# Altium PCB YYB.PcbDoc (part 2 of 2)
Units mil, origin at the board's own origin, x right, y up, seen from the top; angles counter-clockwise.
Board outline 1345.03 x 10347.55 mil, 2 copper layers (Top Layer, Bottom Layer); 145 components, 177 nets, 539 pads, 284 vias.
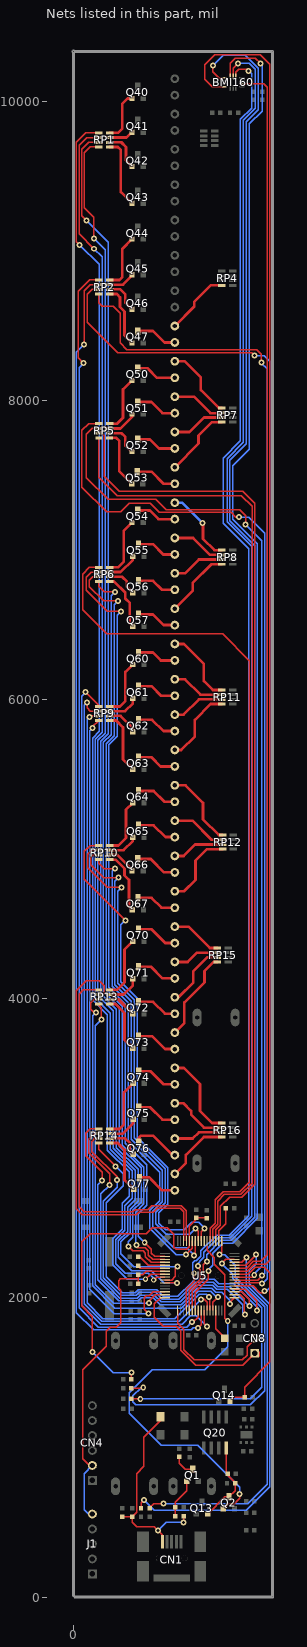
[diagram p2: the nets of this part, all layers, seen from the top]

## Via types
v1: diameter 40, hole 20, Top Layer to Bottom Layer, 282 vias
v2: diameter 35, hole 20, Top Layer to Bottom Layer, 2 vias

## Nets (pads, with @x,y where several pads share a name; then routed paths per layer and width w, separated by ;. In a path a pad name is that pad's centre, name@x,y a point inside that pad or via, vN(x,y) a via of type N, cw(c..) or ccw(c..) an arc to the next point about the centre after c; other vN are vias at no path point) (continued)
NetLD47_1: LD47.1 RP4.4 | length 445.5
  Top Layer w18: LD47.1@676.38,8498.5 805,8627.13 805,8660 915.51,8770.51 RP4.4@990,8770.51
NetLD47_2: LD47.2 Q47.3 | length 280.1
  Top Layer w18: Q47.3@428,8465 530,8465 606.5,8388.5 LD47.2@676.38,8388.5
NetLD50_1: LD50.1 RP7.1 | length 492.8
  Top Layer w18: LD50.1@676.38,8262.28 742.72,8262.28 850,8155 850,8070 970,7950 RP7.1@990,7950
NetLD50_2: LD50.2 Q50.3 | length 274.4
  Top Layer w18: Q50.3@428,8215 495,8215 557.72,8152.28 LD50.2@676.38,8152.28
NetLD51_1: LD51.1 RP7.2 | length 370.2
  Top Layer w18: LD51.1@676.38,8026.06 803.94,8026.06 913.99,7916.01 995,7916.01 992.5,7918.5 RP7.2@990,7918.5
NetLD51_2: LD51.2 Q51.3 | length 279
  Top Layer w18: Q51.3@428,7990 520,7990 593.94,7916.06 LD51.2@676.38,7916.06
NetLD52_1: LD52.1 RP7.3 | length 353.9
  Top Layer w18: LD52.1@676.38,7789.84 774.84,7789.84 872.01,7887.01 RP7.3@990,7887.01
NetLD52_2: LD52.2 Q52.3 | length 273.3
  Top Layer w18: Q52.3@428,7740 510,7740 570.16,7679.84 LD52.2@676.38,7679.84
NetLD53_1: LD53.1 RP7.4 | length 469.6
  Top Layer w18: LD53.1@676.38,7553.62 835,7712.24 835,7765 925.51,7855.51 RP7.4@990,7855.51
NetLD53_2: LD53.2 Q53.3 | length 285.1
  Top Layer w18: Q53.3@425,7525 520,7525 601.38,7443.62 LD53.2@676.38,7443.62
NetLD54_1: LD54.1 RP8.1 | length 503.7
  Top Layer w18: v1(860,7180) 865,7175 865,7075 940,7000 RP8.1@990,7000
  Bottom Layer w18: LD54.1@676.38,7317.4 722.6,7317.4 v1(860,7180)
NetLD54_2: LD54.2 Q54.3 | length 272.2
  Top Layer w18: Q54.3@428,7265 510,7265 567.6,7207.4 LD54.2@676.38,7207.4
NetLD55_1: LD55.1 RP8.2 | length 360.3
  Top Layer w18: LD55.1@676.38,7081.18 798.82,7081.18 911.5,6968.5 RP8.2@990,6968.5
NetLD55_2: LD55.2 Q55.3 | length 271.9
  Top Layer w18: Q55.3@433,7040 530,7040 598.82,6971.18 LD55.2@676.38,6971.18
NetLD56_1: LD56.1 RP8.3 | length 351.7
  Top Layer w18: LD56.1@676.38,6844.96 744.96,6844.96 837.01,6937.01 RP8.3@990,6937.01
NetLD56_2: LD56.2 Q56.3 | length 268.2
  Top Layer w18: Q56.3@433,6795 530,6795 590.04,6734.96 LD56.2@676.38,6734.96
NetLD57_1: LD57.1 RP8.4 | length 467.4
  Top Layer w18: LD57.1@676.38,6608.74 795,6727.36 795,6780 920.51,6905.51 RP8.4@990,6905.51
NetLD57_2: LD57.2 Q57.3 | length 272.9
  Top Layer w18: Q57.3@433,6570 530,6570 601.26,6498.74 LD57.2@676.38,6498.74
NetLD60_1: LD60.1 RP11.1 | length 508.4
  Top Layer w18: LD60.1@676.38,6372.52 737.48,6372.52 870,6240 870,6125 930,6065 RP11.1@990,6065
NetLD60_2: LD60.2 Q60.3 | length 265.1
  Top Layer w18: Q60.3@433,6315 530,6315 582.48,6262.52 LD60.2@676.38,6262.52
NetLD61_1: LD61.1 RP11.2 | length 356.2
  Top Layer w18: LD61.1@676.38,6136.3 743.7,6136.3 846.5,6033.5 RP11.2@990,6033.5
NetLD61_2: LD61.2 Q61.3 | length 269.8
  Top Layer w18: Q61.3@433,6090 520,6090 583.7,6026.3 LD61.2@676.38,6026.3
NetLD62_1: LD62.1 RP11.3 | length 355.8
  Top Layer w18: LD62.1@676.38,5900.08 735.08,5900.08 837.01,6002.01 RP11.3@990,6002.01
NetLD62_2: LD62.2 Q62.3 | length 274.4
  Top Layer w18: Q62.3@433,5865 525,5865 599.92,5790.08 LD62.2@676.38,5790.08
NetLD63_1: LD63.1 RP11.4 | length 505.1
  Top Layer w18: LD63.1@676.38,5663.86 718.86,5663.86 810,5755 810,5865 915.51,5970.51 RP11.4@990,5970.51
NetLD63_2: LD63.2 Q63.3 | length 268.7
  Top Layer w18: Q63.3@433,5615 520,5615 581.14,5553.86 LD63.2@676.38,5553.86
NetLD64_1: LD64.1 RP12.1 | length 520.8
  Top Layer w18: LD64.1@676.38,5427.64 747.36,5427.64 865,5310 865,5200 970,5095 RP12.1@995,5095
NetLD64_2: LD64.2 Q64.3 | length 273.4
  Top Layer w18: Q64.3@433,5390 535,5390 607.36,5317.64 LD64.2@676.38,5317.64
NetLD65_1: LD65.1 RP12.2 | length 371.6
  Top Layer w18: LD65.1@676.38,5191.42 793.58,5191.42 921.5,5063.5 RP12.2@995,5063.5
NetLD65_2: LD65.2 Q65.3 | length 275.9
  Top Layer w18: Q65.3@433,5160 535,5160 613.58,5081.42 LD65.2@676.38,5081.42
NetLD66_1: LD66.1 RP12.3 | length 350.4
  Top Layer w18: LD66.1@676.38,4955.2 735.2,4955.2 812.01,5032.01 RP12.3@995,5032.01
NetLD66_2: LD66.2 Q66.3 | length 285.6
  Top Layer w18: Q66.3@428,4935 515,4935 604.8,4845.2 LD66.2@676.38,4845.2
NetLD67_1: LD67.1 RP12.4 | length 511.4
  Top Layer w18: LD67.1@676.38,4718.98 738.98,4718.98 815,4795 815,4925 890.51,5000.51 RP12.4@995,5000.51
NetLD67_2: LD67.2 Q67.3 | length 273.7
  Top Layer w18: Q67.3@430,4675 520,4675 586.02,4608.98 LD67.2@676.38,4608.98
NetLD70_1: LD70.1 RP15.1 | length 342.8
  Top Layer w18: LD70.1@676.38,4482.76 767.24,4482.76 910,4340 RP15.1@960,4340
NetLD70_2: LD70.2 Q70.3 | length 281.6
  Top Layer w18: Q70.3@433,4465 520,4465 612.24,4372.76 LD70.2@676.38,4372.76
NetLD71_1: LD71.1 RP15.2 | length 309.3
  Top Layer w18: LD71.1@676.38,4246.54 761.54,4246.54 823.5,4308.5 RP15.2@960,4308.5
NetLD71_2: LD71.2 Q71.3 | length 275.9
  Top Layer w18: Q71.3@433,4215 515,4215 593.46,4136.54 LD71.2@676.38,4136.54
NetLD72_1: LD72.1 RP15.3 | length 438
  Top Layer w18: LD72.1@676.38,4010.32 700.32,4010.32 800,4110 800,4185 892.01,4277.01 RP15.3@960,4277.01
NetLD72_2: LD72.2 Q72.3 | length 276.4
  Top Layer w18: Q72.3@433,3980 530,3980 609.68,3900.32 LD72.2@676.38,3900.32
NetLD73_1: LD73.1 RP15.4 | length 603.2
  Top Layer w18: LD73.1@676.38,3774.09 740,3837.72 740,3975 875,4110 875,4185 935.51,4245.51 RP15.4@960,4245.51
NetLD73_2: LD73.2 Q73.3 | length 279
  Top Layer w18: Q73.3@433,3750 525,3750 610.91,3664.09 LD73.2@676.38,3664.09
NetLD74_1: LD74.1 RP16.1 | length 571.4
  Top Layer w18: LD74.1@676.38,3537.87 737.13,3537.87 845,3430 845,3250 925,3170 RP16.1@990,3170
NetLD74_2: LD74.2 Q74.3 | length 277.5
  Top Layer w18: Q74.3@435,3515 515,3515 602.13,3427.87 LD74.2@676.38,3427.87
NetLD75_1: LD75.1 RP16.2 | length 395.8
  Top Layer w18: LD75.1@676.38,3301.65 733.35,3301.65 785,3250 785,3225 871.5,3138.5 RP16.2@990,3138.5
NetLD75_2: LD75.2 Q75.3 | length 275.9
  Top Layer w18: Q75.3@435,3275 510,3275 593.35,3191.65 LD75.2@676.38,3191.65
NetLD76_1: LD76.1 RP16.3 | length 330.8
  Top Layer w18: LD76.1@676.38,3065.43 795.43,3065.43 837.01,3107.01 RP16.3@990,3107.01
NetLD76_2: LD76.2 Q76.3 | length 331.3
  Top Layer w18: Q76.3@435,3040 435,3070 450,3085 530,3085 659.57,2955.43 LD76.2@676.38,2955.43
NetLD77_1: LD77.1 RP16.4 | length 446.2
  Top Layer w18: LD77.1@676.38,2829.21 750,2902.83 750,2955 870.51,3075.51 RP16.4@990,3075.51
NetLD77_2: LD77.2 Q77.3 | length 271.9
  Top Layer w18: Q77.3@440,2805 505,2805 590.79,2719.21 LD77.2@676.38,2719.21
NetQ1_1: Q1.1 R30.1 R31.2 | length 266.9
  Top Layer w10: R30.1@680,540 R31.2@680,600 680,635 757,712 Q1.1@757,775
NetQ1_3: Q1.3 R33.1 | length 149.1
  Top Layer w10: R33.1@705,937.5 705,895 745,855 Q1.3@795,855
NetQ2_3: Q2.3 Q13.2 Q20.4 R34.1 R35.1 | length 560.5
  Top Layer w10: Q13.2@895,555 1010,670 Q2.3@1038,670 1080,712 R34.1@1080,760 1080,765 1030,815 R35.1@1030,825 1020,835 Q20.4@1020,997.64
NetQ40_1: Q40.1 RP1.8 | length 341.9
  Top Layer w18: RP1.8@240,9790 295,9790 325,9820 325,9985 360,10020 Q40.1@390,10020
NetQ41_1: Q41.1 RP1.7 | length 165.1
  Top Layer w18: RP1.7@240,9758.5 353.5,9758.5 Q41.1@390,9795
NetQ42_1: Q42.1 RP1.6 | length 269.8
  Top Layer w18: RP1.6@240,9727.01 317.99,9727.01 350,9695 350,9605 Q42.1@390,9565
NetQ43_1: Q43.1 RP1.5 | length 469.6
  Top Layer w18: RP1.5@240,9695.51 294.49,9695.51 315,9675 315,9395 Q43.1@390,9320
NetQ44_1: Q44.1 RP2.8 | length 374.6
  Top Layer w18: RP2.8@240,8806.5 306.5,8806.5 325,8825 325,9015 Q44.1@390,9080
NetQ45_1: Q45.1 RP2.7 | length 179.9
  Top Layer w18: RP2.7@240,8775 330,8775 390,8835 Q45.1@390,8840
NetQ46_1: Q46.1 RP2.6 | length 237.5
  Top Layer w18: RP2.6@240,8743.5 311.5,8743.5 345,8710 345,8655 Q46.1@390,8610
NetQ47_1: Q47.1 RP2.5 | length 417.3
  Top Layer w18: RP2.5@240,8712.01 287.99,8712.01 310,8690 310,8625 340,8595 340,8435 Q47.1@390,8385
NetQ50_1: Q50.1 RP5.8 | length 381.4
  Top Layer w18: RP5.8@240,7845 290,7845 330,7885 330,8075 Q50.1@390,8135
NetQ51_1: Q51.1 RP5.7 | length 201.7
  Top Layer w18: RP5.7@240,7813.5 313.5,7813.5 390,7890 Q51.1@390,7910
NetQ52_1: Q52.1 RP5.6 | length 232.8
  Top Layer w18: RP5.6@240,7782.01 317.99,7782.01 345,7755 345,7700 385,7660 Q52.1@390,7660
NetQ53_1: Q53.1 RP5.5 | length 392.5
  Top Layer w18: RP5.5@240,7750.51 284.49,7750.51 305,7730 305,7527 Q53.1@387,7445
NetQ54_1: Q54.1 RP6.8 | length 394.4
  Top Layer w18: RP6.8@240,6885 295,6885 335,6925 335,7130 Q54.1@390,7185
NetQ55_1: Q55.1 RP6.7 | length 213.8
  Top Layer w18: RP6.7@240,6853.5 313.5,6853.5 395,6935 Q55.1@395,6960
NetQ56_1: Q56.1 RP6.6 | length 219.8
  Top Layer w18: RP6.6@240,6822.01 322.99,6822.01 355,6790 355,6755 Q56.1@395,6715
NetQ57_1: Q57.1 RP6.5 | length 382
  Top Layer w18: RP6.5@240,6790.51 269.49,6790.51 345,6715 345,6675 375,6645 375,6510 Q57.1@395,6490
NetQ60_1: Q60.1 RP9.8 | length 385.2
  Top Layer w18: RP9.8@240,5955 310,5955 345,5990 345,6185 Q60.1@395,6235
NetQ61_1: Q61.1 RP9.7 | length 211.3
  Top Layer w18: RP9.7@240,5923.5 343.5,5923.5 395,5975 Q61.1@395,6010
NetQ62_1: Q62.1 RP9.6 | length 214
  Top Layer w18: RP9.6@240,5892.01 312.99,5892.01 395,5810 Q62.1@395,5785
NetQ63_1: Q63.1 RP9.5 | length 415.8
  Top Layer w18: RP9.5@240,5860.51 284.49,5860.51 330,5815 330,5600 Q63.1@395,5535
NetQ64_1: Q64.1 RP10.8 | length 384.4
  Top Layer w18: RP10.8@240,5025 300,5025 350,5075 350,5265 Q64.1@395,5310
NetQ65_1: Q65.1 RP10.7 | length 205.5
  Top Layer w18: RP10.7@240,4993.5 333.5,4993.5 395,5055 Q65.1@395,5080
NetQ66_1: Q66.1 RP10.6 | length 200.2
  Top Layer w18: RP10.6@240,4962.01 292.99,4962.01 390,4865 Q66.1@390,4855
NetQ67_1: Q67.1 RP10.5 | length 421.6
  Top Layer w18: RP10.5@240,4930.51 279.49,4930.51 340,4870 340,4825 370,4795 370,4617 Q67.1@392,4595
NetQ70_1: Q70.1 RP13.8 | length 418.5
  Top Layer w18: RP13.8@240,4060 290,4060 340,4110 340,4330 Q70.1@395,4385
NetQ71_1: Q71.1 RP13.7 | length 225.5
  Top Layer w18: RP13.7@240,4028.5 333.5,4028.5 395,4090 Q71.1@395,4135
NetQ72_1: Q72.1 RP13.6 | length 195.2
  Top Layer w18: RP13.6@240,3997.01 297.99,3997.01 Q72.1@395,3900
NetQ73_1: Q73.1 RP13.5 | length 382.8
  Top Layer w18: RP13.5@240,3965.51 279.49,3965.51 340,3905 340,3725 Q73.1@395,3670
NetQ74_1: Q74.1 RP14.8 | length 408.1
  Top Layer w18: RP14.8@240,3130 305,3130 335,3160 335,3373 Q74.1@397,3435
NetQ75_1: Q75.1 RP14.7 | length 213.4
  Top Layer w18: RP14.7@240,3098.5 328.5,3098.5 397,3167 Q75.1@397,3195
NetQ76_1: Q76.1 RP14.6 | length 232.4
  Top Layer w18: RP14.6@240,3067.01 342.99,3067.01 375,3035 375,2982 Q76.1@397,2960
NetQ77_1: Q77.1 RP14.5 | length 409.5
  Top Layer w18: RP14.5@240,3035.51 294.49,3035.51 340,2990 340,2787 Q77.1@402,2725
NetR7_2: R7.2 R13.1 R15.2 U5.60 | length 2285
  Top Layer w10: v1(125,1640) 125,1875 54,1946 54,2374 110,2430 485,2430 525,2470 625,2470 670,2425 670,2340 685,2325 755,2325 773.58,2343.58 U5.60@773.58,2381.69 773.58,2478.58 820,2525 R13.1@820,2535 887.5,2535 R15.2@890,2532.5 ; R7.2@385,1455 v1(385,1500)
  Bottom Layer w10: v1(125,1640) 265,1500 v1(385,1500)
NetR11_1: R11.1 U5.5 | length 203.6
  Top Layer w10: R11.1@430,2275 440,2275 496.89,2218.11 U5.5@610,2218.11
NetR12_1: R12.1 U5.6 | length 186.9
  Top Layer w10: R12.1@430,2215 446.57,2198.43 U5.6@610,2198.43
NRST: C13.1 CN4.2 J1.5 R14.2 U5.7 | length 2180.2
  Top Layer w10: CN4.2@125,880 105,880 60,925 60,1520 217.5,1677.5 217.5,1777.5 245,1805 285,1805 315,1835 315,2050 300,2065 300,2115 312,2127 427,2127 430,2130 ; R14.2@430,2095 430,2130 ; U5.7@610,2178.74 483.74,2178.74 460,2155 C13.1@430,2155 430,2130
  Bottom Layer w10: J1.5@125,555 100,555 70,585 70,825 CN4.2@125,880
P_LANCH: Q2.1 U5.54 | length 2824.7
  Top Layer w10: 891.69,2345 891.69,2318.31 940,2270 940,2225 1010,2155 1010,1865 v1(1030,1845) ; Q2.1@1000,590 1035,625 1075,625 1110,660 v1(1110,690)
  Bottom Layer w10: v1(1030,1845) 1030,1675 875,1520 525,1520 370,1365 370,1230 585,1015 830,1015 1110,735 v1(1110,690) v1@1110,675
PA0: RP9.4 U5.14 | length 4560
  Top Layer w10: v1(125,5810) 125,5818 RP9.4@167.51,5860.51 ; v1(500,1895) 472,1923 472,2002 485,2015 505,2015 530.95,2040.95 U5.14@610,2040.95
  Bottom Layer w10: v1(125,5810) 108,5793 108,2057 270,1895 v1(500,1895)
PA1: RP13.4 U5.15 | length 2452.8
  Top Layer w10: RP13.4@167.51,3965.51 167.51,3957.49 185,3940 v1(185,3860) ; v1(505,1965) 505,1980 546.26,2021.26 U5.15@610,2021.26
  Bottom Layer w10: v1(185,3860) 144,3819 144,2087.46 268.46,1963 503,1963 v1(505,1965)
PA2: CN8.1 U5.16 | length 1124.9
  Top Layer w10: U5.16@610,2001.58 581.57,2001.58 540,1960 540,1870 600,1810 685,1810 715,1780 715,1649.54 814.54,1550 1130,1550 CN8.1@1210,1630 ; CN8.1@1232.5,1607.5 1240,1615 1240,1640
PA3: CN8.2 U5.17 | length 889.1
  Top Layer w10: U5.17@694.57,1917.01 694.57,1830.43 735,1790 735,1655 805,1585 1128.39,1585 1160,1616.61 1160,1675 CN8.2@1220,1735
PA4: BMI160.12 U5.20 | length 8805.5
  Top Layer w10: U5.20@753.62,1917.01 753.62,2058.62 805,2110 v1(805,2165) ; BMI160.12@1085,10168.74 1085,10195 1105,10215 1160,10215 v1(1170,10205)
  Bottom Layer w10: v1(805,2165) 805,2170 795,2180 795,2235 810,2250 820,2250 850,2280 850,2315 955,2420 1040,2420 1170,2550 1170,7010 1000,7180 1000,7615 1115,7730 1115,9880 1190,9955 1190,10185 v1(1170,10205)
PA5: BMI160.13 U5.21 | length 8910.6
  Top Layer w10: U5.21@773.31,1917.01 773.31,2052.85 845,2124.54 845,2190 830,2205 v1(830,2215) ; BMI160.13@1065.32,10168.74 1065.32,10220.32 v1(1100,10255)
  Bottom Layer w10: v1(830,2215) 830,2231.67 830.33,2232 832.46,2232 843,2242.54 843,2244.67 870,2271.67 870,2305 967,2402 1047.46,2402 1190,2544.54 1190,7025 1025,7190 1025,7610 1135,7720 1135,9874.54 1215,9954.54 1215,10215 1175,10255 v1(1100,10255)
PA6: BMI160.1 U5.22 | length 9169.1
  Top Layer w10: U5.22@792.99,1917.01 792.99,2047.08 867,2121.09 867,2222 v1(890,2245) ; v1(930,10240) 930,10200 971.1,10158.9 BMI160.1@1006.26,10158.9
  Bottom Layer w10: v1(890,2245) 890,2290 984,2384 1054.91,2384 1210,2539.09 1210,7030.46 1045,7195.46 1045,7600 1155,7710 1155,9865 1235,9945 1235,10220.46 1145.46,10310 1000,10310 v1(930,10240)
PA7: BMI160.14 U5.23 | length 9021.3
  Top Layer w10: U5.23@812.68,1917.01 812.68,2037.68 900,2125 v1(900,2180) ; BMI160.14@1045.63,10168.74 1045.63,10255.63 1080,10290 1215,10290 v1(1250,10255)
  Bottom Layer w10: v1(900,2180) 900,2190 930,2220 930,2300 996,2366 1062.37,2366 1228,2531.63 1228,7042 1065,7205 1065,7565 1175,7675 1175,9850 1260,9935 1260,10245 v1(1250,10255)
PA8: Q14.2 R37.2 U5.41 | length 1282.7
  Top Layer w10: Q14.2@1045,1310 1070,1335 R37.2@1142.5,1335 1142.5,1402.5 1312,1572 1312,2168 1275,2205 1213.04,2205 1167.09,2159.06 U5.41@1074.68,2159.06
PA9: BMI160.4 U5.42 | length 9002.8
  Top Layer w10: BMI160.4@1006.26,10099.84 925.16,10099.84 875,10150 875,10245 943,10313 1247,10313 1312,10248 1312,2252 1285,2225 1207.58,2225 1161.32,2178.74 U5.42@1074.68,2178.74
PA10: BMI160.9 U5.43 | length 8243.2
  Top Layer w10: U5.43@1074.68,2198.43 1155.55,2198.43 1202.12,2245 1250,2245 1294,2289 1294,10096 1270.47,10119.53 BMI160.9@1124.37,10119.53
PA11: R18.2 U5.44 | length 2806.9
  Top Layer w10: R18.2@450,592.5 450,630 v1(470,650) ; U5.44@1074.68,2218.11 1149.78,2218.11 1220,2288.33 v1(1220,2290)
  Bottom Layer w10: v1(470,650) 540,580 1155,580 1312,737 1312,1956.49 1174.18,2094.31 1174.18,2184.18 1220,2230 v1(1220,2290)
PA12: R17.2 U5.45 | length 2522.5
  Top Layer w10: R17.2@510,592.5 510,600 535,625 v1(600,625) ; U5.45@1074.68,2237.8 1122.8,2237.8 v1(1155,2270)
  Bottom Layer w10: v1(600,625) 1165,625 1294,754 1294,1949.04 1155,2088.04 v1(1155,2270)
PA13: R8.2 U5.46 | length 1939.4
  Top Layer w10: R8.2@385,1325 v1(445,1325) ; v1(990,2230) 1017.48,2257.48 U5.46@1074.68,2257.48
  Bottom Layer w10: v1(445,1325) 1180,1325 1258,1403 1258,1934.12 1062,2130.12 1062,2158 v1(990,2230)
PA14: R9.2 U5.49 | length 2299.5
  Top Layer w10: R9.2@385,1395 460,1395 v1(465,1400) ; v1(975,2290) 990.12,2305.12 U5.49@990.12,2381.69 U5.49@990.12,2385.12
  Bottom Layer w10: v1(465,1400) 450,1400 395,1345 395,1305 415,1285 1180,1285 1276,1381 1276,1941.58 1080,2137.58 1080,2220 1010,2290 v1(975,2290)
PA15: LD3.2 U5.50 | length 237.8
  Top Layer w10: U5.50@970.43,2381.69 970.43,2449.07 1017.5,2496.13 LD3.2@1017.5,2600
PB0: RP9.1 U5.26 | length 5294.8
  Top Layer w10: v1(80,6050) 167.51,5962.49 RP9.1@167.51,5955 ; U5.26@871.73,1917.01 871.73,1828.27 v1(890,1810)
  Bottom Layer w10: v1(80,6050) 54,6024 54,1952.35 181.35,1825 725,1825 780,1880 820,1880 v1(890,1810)
PB1: RP9.2 U5.27 | length 5139.6
  Top Layer w10: v1(90,5980) 90,5945 111.5,5923.5 RP9.2@167.51,5923.5 ; v1(850,1990) 872.84,1990 891.42,1971.42 U5.27@891.42,1917.01
  Bottom Layer w10: v1(90,5980) 72,5962 72,1959.81 187.81,1844 704.91,1844 850,1989.09 v1(850,1990)
PB2: RP9.3 U5.28 | length 5017.2
  Top Layer w10: v1(105,5885) 112.01,5892.01 RP9.3@167.51,5892.01 ; v1(905,2005) 911.1,1998.9 U5.28@911.1,1917.01
  Bottom Layer w10: v1(105,5885) 100,5885 90,5875 90,1967.27 195.27,1862 675.33,1862 838.33,2025 885,2025 v1(905,2005)
PB3: U5.55
PB4: RP10.1 U5.56 | length 3333.5
  Top Layer w10: RP10.1@167.51,5025 110,5025 70,4985 70,4800 v1(345,4525) ; U5.56@852.32,2381.69 852.32,2442.32 v1(875,2465)
  Bottom Layer w10: v1(345,4525) 315,4495 315,4115 425,4005 425,3075 629,2871 629,2627.63 570,2568.63 570,2500 615,2455 740,2455 790,2505 835,2505 v1(875,2465)
PB5: RP10.2 U5.57 | length 3271.1
  Top Layer w10: RP10.2@167.51,4993.5 123.5,4993.5 95,4965 95,4875 225,4745 v1(320,4745) ; v1(815,2465) 832.64,2447.36 U5.57@832.64,2381.69
  Bottom Layer w10: v1(320,4745) 295,4720 295,4105 405,3995 405,3069.54 611,2863.54 611,2635.09 550,2574.09 550,2494.54 619.54,2425 775,2425 v1(815,2465)
PB6: RP10.3 U5.58 | length 3286.6
  Top Layer w10: RP10.3@167.51,4962.01 132.01,4962.01 115,4945 115,4895 200,4810 v1(300,4810) ; v1(805,2285) 812.95,2292.95 U5.58@812.95,2381.69
  Bottom Layer w10: v1(300,4810) 275,4785 275,4095 385,3985 385,3060 593,2852 593,2642.54 530,2579.54 530,2475 670,2335 755,2335 v1(805,2285)
PB7: RP10.4 U5.59 | length 3139.2
  Top Layer w10: RP10.4@167.51,4930.51 167.51,4907.49 205,4870 v1(275,4870) ; v1(750,2290) 793.27,2333.27 U5.59@793.27,2381.69
  Bottom Layer w10: v1(275,4870) 257,4852 257,4083 365,3975 365,3050 575,2840 575,2650 510,2585 510,2465 685,2290 v1(750,2290)
PB8: RP13.1 U5.61 | length 2529.4
  Top Layer w10: RP13.1@167.51,4060 65,4060 36,4031 36,2609 70,2575 394,2575 410,2591 495.54,2591 521.54,2617 718.46,2617 753.9,2581.56 U5.61@753.9,2381.69
PB9: RP13.2 U5.62 | length 2726.5
  Top Layer w10: RP13.2@167.51,4028.5 193.5,4028.5 203.75,4038.75 203.75,4086.25 170,4120 85,4120 18,4053 18,2595 56,2557 417.46,2557 433.46,2573 533,2573 559,2599 711,2599 734.21,2575.79 U5.62@734.21,2381.69
PB10: RP13.3 U5.29 | length 3065.7
  Top Layer w10: v1(150,3910) 135,3910 115,3930 115,3975 137.01,3997.01 RP13.3@167.51,3997.01 ; U5.29@930.79,1917.01 930.79,1970.79 v1(965,2005)
  Bottom Layer w10: v1(150,3910) 126,3886 126,2080 274,1932 719.88,1932 832.88,2045 915,2045 955,2005 v1(965,2005) v1@965,2015
PB11: C26.1 U5.30 | length 211.7
  Top Layer w10: U5.30@950.47,1917.01 950.47,1794.53 1010,1735 C26.1@1010,1730
PB12: RP14.1 U5.33 | length 2261.5
  Top Layer w10: RP14.1@167.51,3130 110,3130 80,3100 80,2950 190,2840 v1(190,2785) ; v1(1045,1960) 1045,1971.89 U5.33@1074.68,2001.58
  Bottom Layer w10: v1(190,2785) 162,2757 162,2120 208,2074 ; 208,2073.96 300.96,1981 432.37,1981 452.37,2001 532.63,2001 577.63,1956 718.42,1956 827.42,2065 923.63,2065 949.63,2039 990.54,2039 1045,1984.54 v1(1045,1960)
PB13: RP14.2 U5.34 | length 2482.5
  Top Layer w10: RP14.2@167.51,3098.5 138.5,3098.5 100,3060 100,2970 240,2830 v1(240,2755) ; U5.34@1074.68,2021.26 1113.74,2021.26 1140.28,1994.72 1140.28,1894.72 v1(1145,1890)
  Bottom Layer w10: 226,2081.42 308.42,1999 424.91,1999 444.91,2019 540.09,2019 585.09,1974 710.96,1974 820.96,2084 930.09,2084 957.09,2057 1028,2057 1130,1955 1130,1905 v1(1145,1890) ; 226,2081.46 180,2127.46 180,2695 v1(240,2755)
PB14: RP14.3 U5.35 | length 2418.6
  Top Layer w10: RP14.3@167.51,3067.01 142.01,3067.01 120,3045 120,3040.91 121,3039.91 121,2979 290,2810 v1(290,2790) v1@290,2779.54 ; U5.35@1074.68,2040.95 1124.05,2040.95 1175,1990 v1(1175,1945)
  Bottom Layer w10: v1(290,2790) 290,2740 198,2648 198,2134.91 244,2088.91 315.88,2017 417.46,2017 437.46,2037 547.54,2037 592.54,1992 703.51,1992 806,2094.49 806,2095.54 815.46,2105 934.54,2105 964.54,2075 1045,2075 v1(1175,1945)
PB15: RP14.4 U5.36 | length 2495.7
  Top Layer w10: RP14.4@167.51,3035.51 167.51,2992.49 v1(280,2880) ; U5.36@1074.68,2060.63 1076.32,2059 1145.54,2059 1225,1979.54 v1(1225,1915)
  Bottom Layer w10: v1(280,2880) 330,2830 330,2750 216,2636 216,2142.37 323.37,2035 410,2035 430,2055 555,2055 600,2010 696.05,2010 788,2101.95 788,2103 810,2125 940,2125 970,2095 1071.67,2095 1235,1931.67 1225,1921.67 v1(1225,1915)
PC0: RP1.1 U5.8 | length 8310.1
  Top Layer w10: v1(40,9040) 18,9062 18,9728 80,9790 RP1.1@167.51,9790 ; v2(480,2125) 514.05,2159.06 U5.8@610,2159.06
  Bottom Layer w10: v1(40,9040) 170,8910 170,5787.73 126,5743.73 126,3994 225,3895 225,2988.63 370,2843.63 370,2680 324,2634 324,2459 262,2397 262,2222.54 359.54,2125 v2(480,2125)
PC1: RP1.2 U5.9 | length 8249
  Top Layer w10: v1(135,9015) 36,9114 36,9706 88.5,9758.5 RP1.2@167.51,9758.5 ; v2(535,2120) 554.37,2139.37 U5.9@610,2139.37
  Bottom Layer w10: v1(135,9015) 190,8960 190,5782.28 144,5736.28 144,4006 245,3905 245,2994.09 390,2849.09 390,2665 342,2617 342,2451.54 280,2389.54 280,2230 345,2165 500,2165 535,2130 v2(535,2120)
PC2: RP1.3 U5.10 | length 8327.1
  Top Layer w10: v1(85,9205) 54,9236 54,9679 102.01,9727.01 RP1.3@167.51,9727.01 ; U5.10@610,2119.68 654.68,2119.68 680,2145 680,2195 v1(695,2210)
  Bottom Layer w10: v1(85,9205) 230,9060 230,5771.37 180,5721.37 180,4035 285,3930 285,3005 430,2860 430,2645.46 378,2593.46 378,2436.63 316,2374.63 316,2296 402,2210 v1(695,2210)
PC3: RP1.4 U5.11 | length 8265.9
  Top Layer w10: v1(135,9085) 135,9225 72,9288 72,9657 110.51,9695.51 RP1.4@167.51,9695.51 ; U5.11@610,2100 v1(690,2100)
  Bottom Layer w10: v1(135,9085) 210,9010 210,5776.82 162,5728.82 162,4023 265,3920 265,2999.54 410,2854.54 410,2655 360,2605 360,2444.09 298,2382.09 298,2272 387,2183 518.67,2183 601.67,2100 v1(690,2100)
PC4: RP2.1 U5.24 | length 7914
  Top Layer w10: v1(65,8250) 30,8285 30,8730 106.5,8806.5 RP2.1@167.51,8806.5 ; v1(790,1840) 800,1840 832.36,1872.36 U5.24@832.36,1917.01
  Bottom Layer w10: v1(65,8250) 36,8221 36,1934 164.94,1805.06 755.06,1805.06 v1(790,1840)
PC5: RP2.2 U5.25 | length 7959.7
  Top Layer w10: v1(70,8375) 70,8735 110,8775 RP2.2@167.51,8775 ; v1(830,1800) 852.05,1822.05 U5.25@852.05,1917.01
  Bottom Layer w10: v1(70,8375) 18,8323 18,1902 132.94,1787.06 787.06,1787.06 800,1800 v1(830,1800)
PC6: RP2.3 U5.37 | length 8092.2
  Top Layer w10: RP2.3@167.51,8743.5 123.5,8743.5 90,8710 90,8525 295,8320 1190,8320 v1(1210,8300) ; U5.37@1074.68,2080.32 1199.68,2080.32 1245,2035 1275,2035 v1(1275,2045)
  Bottom Layer w10: v1(1210,8300) 1275,8300 1312,8263 1312,2067 1280,2035 1275,2035 v1(1275,2045)
PC7: RP2.4 U5.38 | length 7838.7
  Top Layer w10: RP2.4@167.51,8712.01 167.51,8652.49 190,8630 265,8630 310,8585 310,8385 355,8340 1225,8340 1255,8310 v1(1255,8255) ; U5.38@1074.68,2100 1255,2100 v1(1260,2095)
  Bottom Layer w10: v1(1255,8255) 1255,8250 1294,8211 1294,2129 v1(1260,2095)
PC8: RP5.1 U5.39 | length 7075.4
  Top Layer w10: RP5.1@167.51,7845 100,7845 55,7800 55,7420 220,7255 315,7255 372.5,7312.5 512.5,7312.5 573,7252 1053,7252 1085,7220 v1(1105,7220) ; U5.39@1074.68,2119.68 1075.18,2119.18 1229.18,2119.18 v1(1260,2150)
  Bottom Layer w10: v1(1105,7220) 1170,7220 1276,7114 1276,2166 v1(1260,2150)
PC9: RP5.2 U5.40 | length 6840.5
  Top Layer w10: RP5.2@167.51,7813.5 123.5,7813.5 85,7775 85,7485 230,7340 550,7340 620,7270 1110,7270 1150,7230 v1(1150,7170) ; U5.40@1074.68,2139.37 1194.37,2139.37 v1(1207.18,2152.18)
  Bottom Layer w10: v1(1150,7170) 1258,7062 1258,2213 1207.18,2162.18 v1(1207.18,2152.18)
PC10: RP5.3 U5.51 | length 6483.5
  Top Layer w10: RP5.3@167.51,7782.01 187.99,7782.01 204.5,7765.5 204.5,7495.5 305,7395 1130,7395 1211,7314 1211,2760.09 1124.91,2674 1043.12,2674 981,2611.88 981,2485.09 950.75,2454.84 U5.51@950.75,2381.69
PC11: RP5.4 U5.52 | length 6452.7
  Top Layer w10: RP5.4@167.51,7750.51 167.51,7487.49 290,7365 1120,7365 1193,7292 1193,2767.54 1117.46,2692 1007.46,2692 963,2647.54 963,2492.54 931.06,2460.61 U5.52@931.06,2381.69
PC12: RP6.1 U5.53 | length 5673.9
  Top Layer w10: RP6.1@167.51,6885 105,6885 60,6840 60,6600 220,6440 995,6440 1175,6260 1175,2775 1110,2710 1000,2710 945,2655 945,2500 911.38,2466.38 U5.53@911.38,2381.69
PC13: RP6.2 U5.2 | length 5063.9
  Top Layer w10: RP6.2@167.51,6853.5 118.5,6853.5 85,6820 85,6730 225,6590 v1(315,6590) ; v1(475,2370) 520,2325 520,2300 542.84,2277.16 U5.2@610,2277.16
  Bottom Layer w10: v1(315,6590) 290,6565 290,5755 234,5699 234,4076 345,3965 345,3035 490,2890 490,2620 432,2562 432,2413 v1(475,2370)
PC14: RP6.3 U5.3 | length 5061.3
  Top Layer w10: RP6.3@167.51,6822.01 127.01,6822.01 105,6800 105,6755 200,6660 v1(295,6660) ; v1@420,2340 423,2337 478,2337 500,2315 500,2285 527.52,2257.48 U5.3@610,2257.48
  Bottom Layer w10: v1(295,6660) 270,6635 270,5760.46 216,5706.46 216,4059 325,3950 325,3020 470,2875 470,2630 414,2574 414,2354 415,2355 v1(420,2355)
PC15: RP6.4 U5.4 | length 5006.6
  Top Layer w10: RP6.4@167.51,6790.51 167.51,6757.49 205,6720 v1(275,6720) ; v1(365,2345) 395,2315 465,2315 480,2300 480,2275 517.2,2237.8 U5.4@610,2237.8
  Bottom Layer w10: v1(275,6720) 250,6695 250,5765.91 198,5713.91 198,4051.54 305,3944.54 305,3014.54 450,2869.54 450,2640 396,2586 396,2406 365,2375 v1(365,2345)
U5V: CN1.1 D1.1 EAC2.1 EAC3.1 R30.2 | length 1367.2
  Top Layer w10: EAC3.1@325,537.5 EAC2.1@390,537.5 ; D1.1@580,1205 580,1180 470,1070 470,875 420,825 420,567.5 EAC2.1@390,537.5 ; CN1.1@592.11,368.27 592.11,417.89 v1(565,445) 540,470 420,470 390,500 EAC2.1@390,537.5 ; v1(735,500) R30.2@735,540
  Bottom Layer w10: v1(565,445) 620,500 v1(735,500)
pads on no net: BMI160.2 BMI160.3 BMI160.10 BMI160.11 CN1.0 U4.3 U4.5 U5.0

## Polygon pours and split planes (outlines as drawn)
GND on Bottom Layer "Bottom Layer-No Net" (solid, remove dead copper, pour order 6): 0,0 1330,0 1330,10332.52 1327.48,10330 0,10330
GND on Top Layer "Bottom Layer-No Net" (solid, remove dead copper, pour order 8): 0,0 1330,0 1330,10332.52 0,10332.52

## Keep-outs
Keep-Out Layer:
  lines w10: 0,0 1330,0 1330,10332.52 0,10332.52 0,0

## Silkscreen, mask and mechanical layers (free items; w line width, h text height)
Top Overlay:
  lines w10: 1320,10330 1340,10330 ; 1330,10320 1330,10340
  text "1640,9840 (mil)" at 1340,10330 h60

## Text inside footprints (layer, text, board x,y; h text height)
BT1: Bottom Overlay "+" at 380,525 h50 r270
BT2: Bottom Overlay "+" at 765,525 h50 r270
BT3: Bottom Overlay "+" at 925,2685 h50 r270
LD1: Top Overlay "+" at 1125,460 h30 r180
LD3: Top Overlay "+" at 1100,2585 h30